# Altium PCB Control Board.PcbDoc
Units mm, origin at the board's own origin, x right, y up, seen from the top; angles counter-clockwise.
Board outline 60 x 50 mm, 2 copper layers (Top Layer, Bottom Layer); 9 components, 17 nets, 67 pads, 2 vias.
Unrouted connection lines stored in the file: 15.
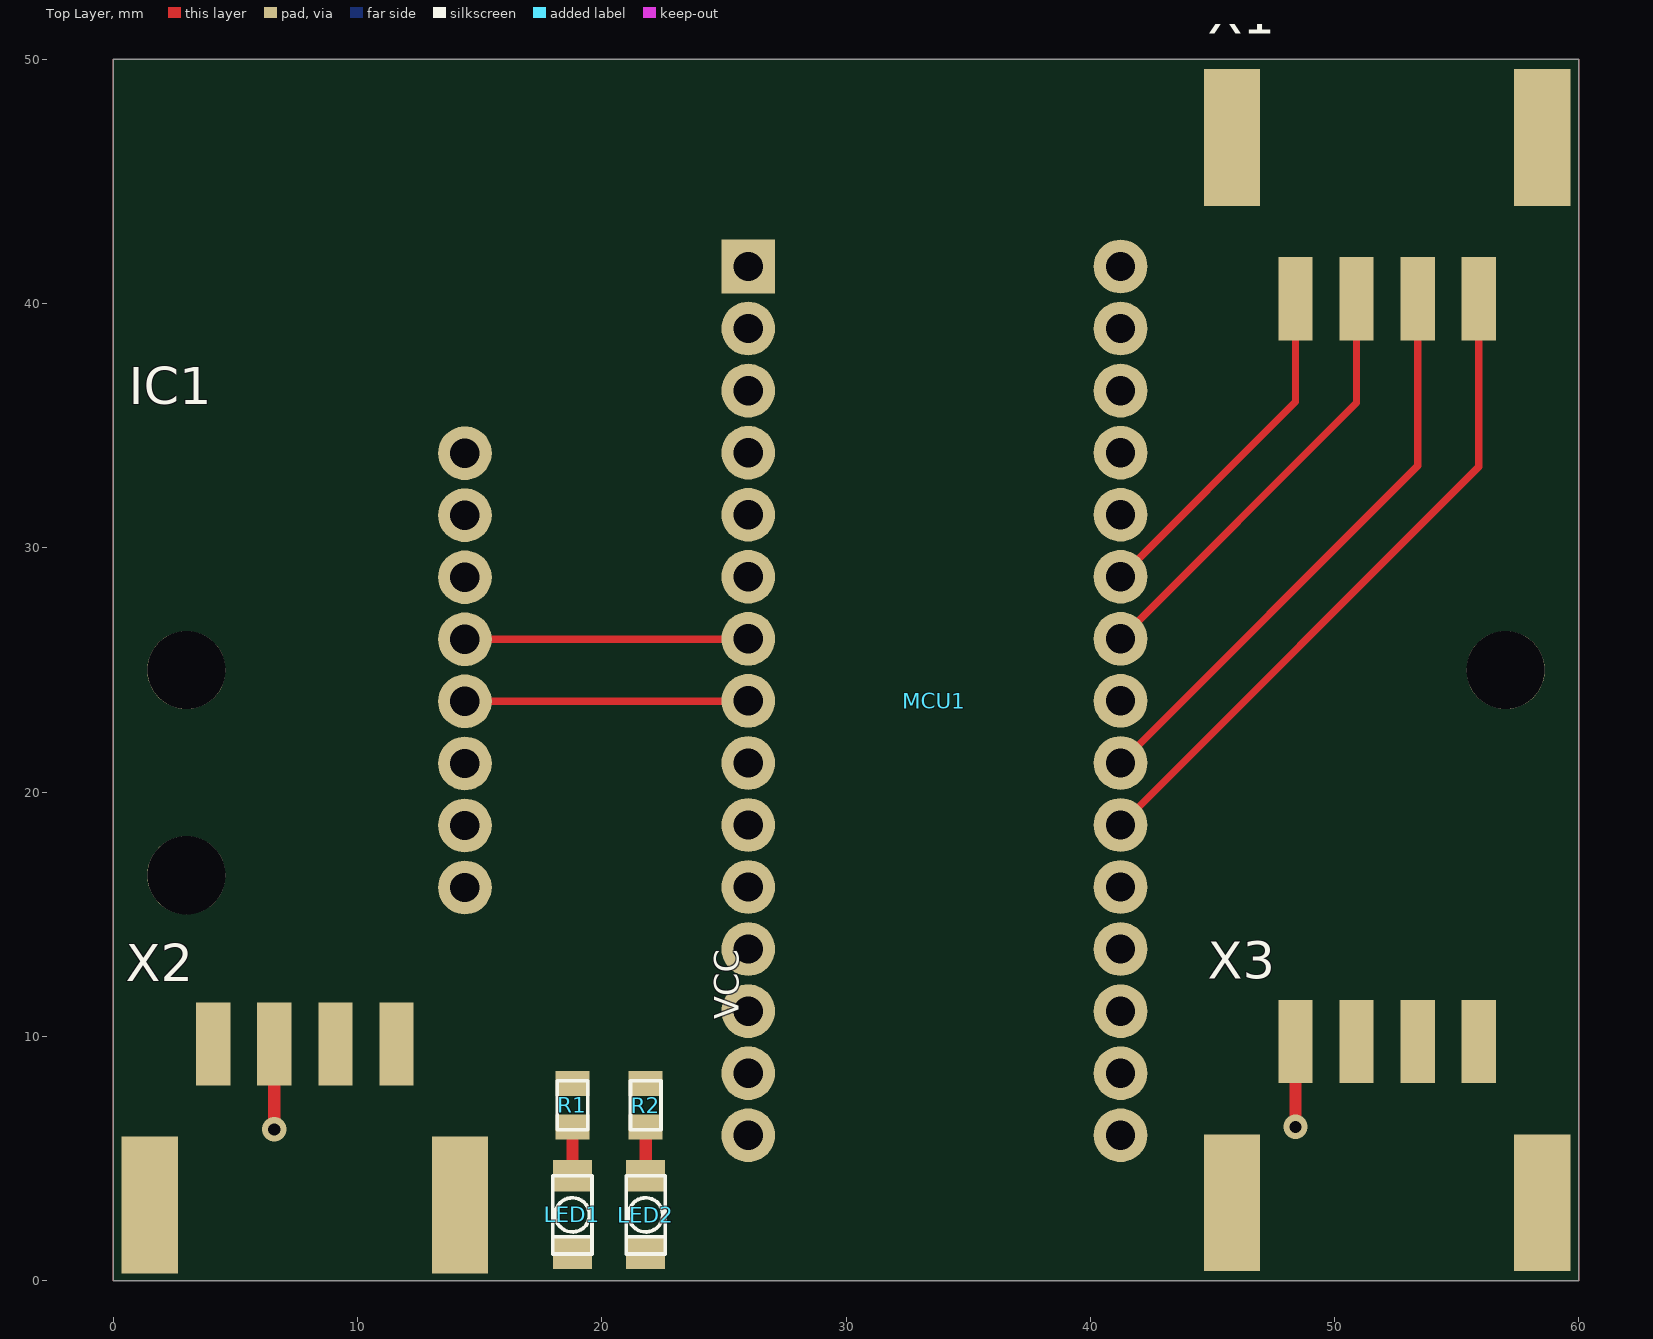
[diagram p0: Top Layer view]
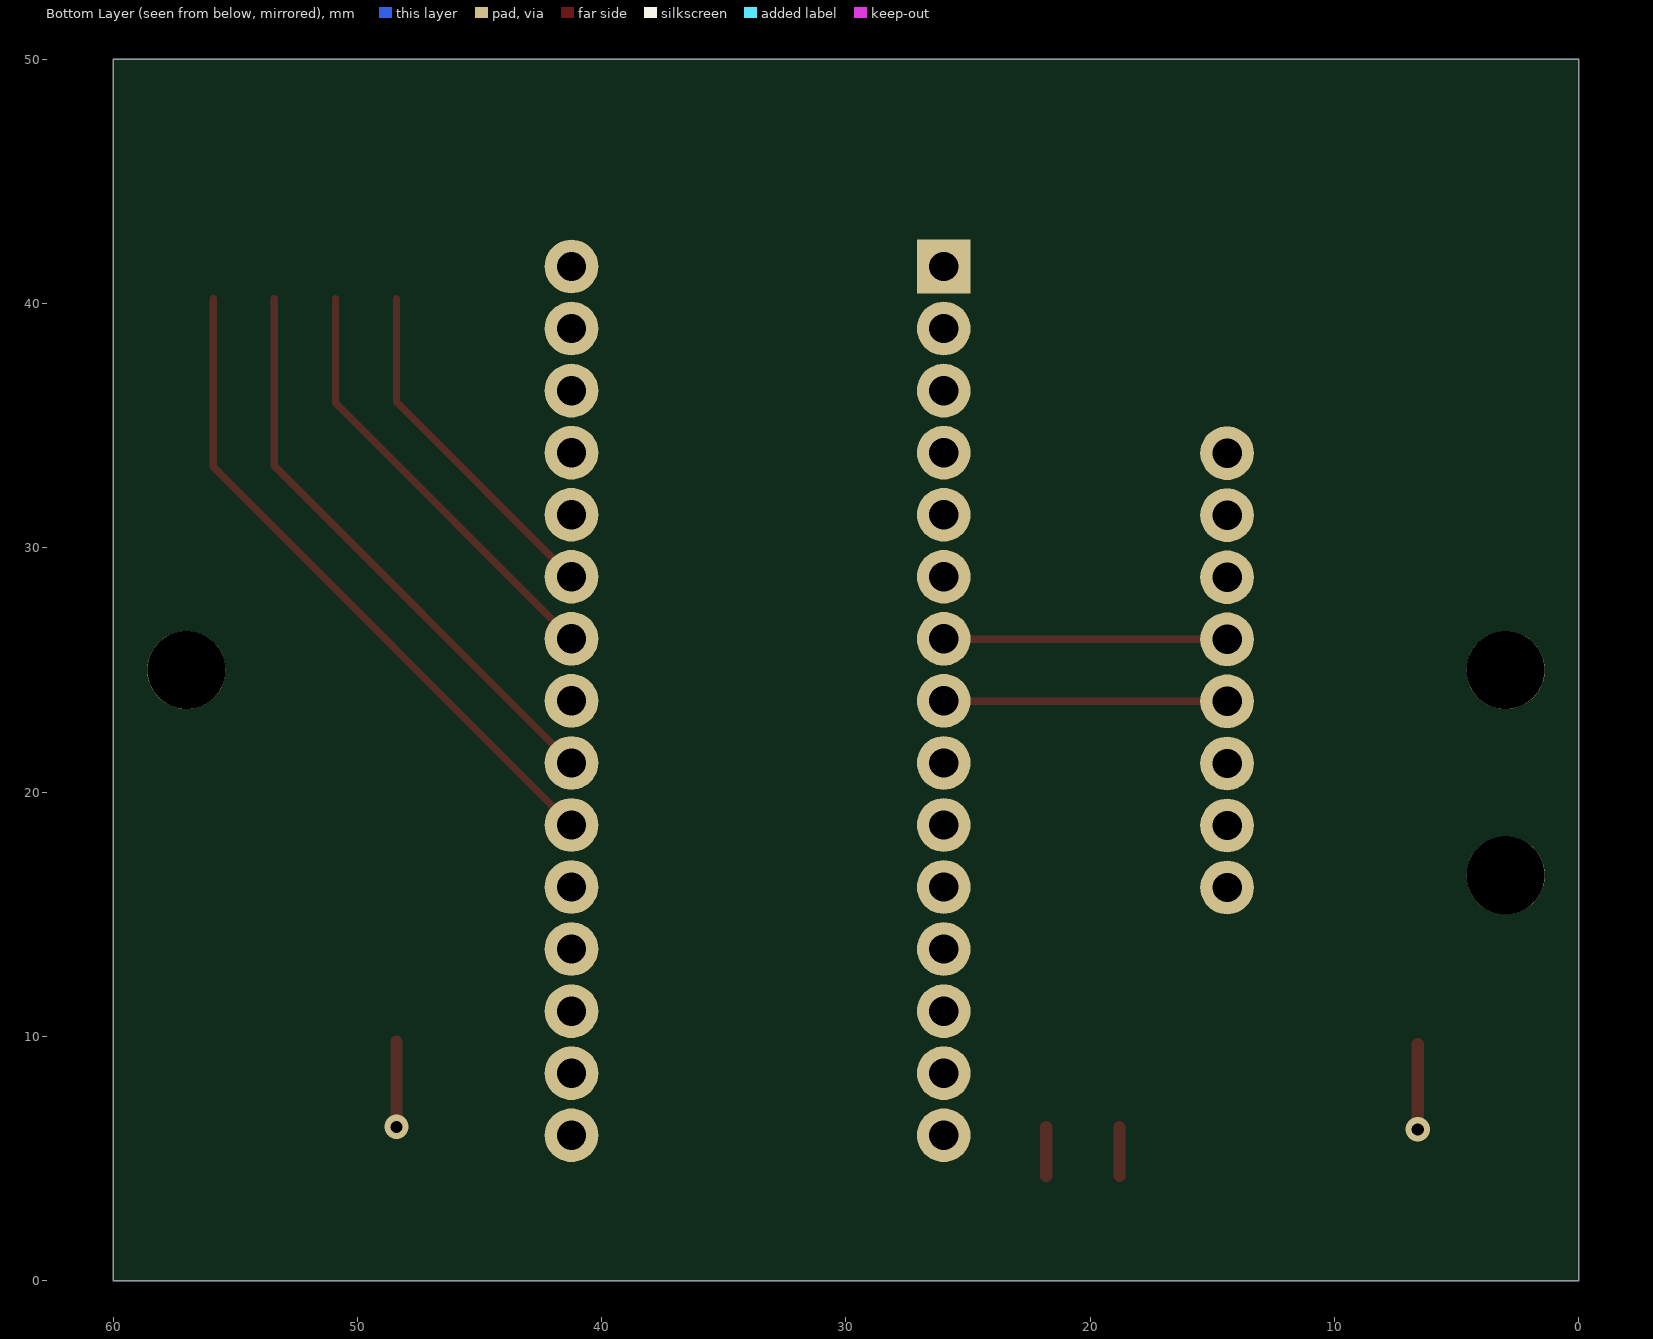
[diagram p1: Bottom Layer view, seen from below]

## Layer stack, top to bottom
Top Solder: solder mask 0.0102, Solder Resist, Dk 3.5
Top Layer: signal copper 0.0356
Dielectric 1: dielectric 0.32, FR-4, Dk 4.8
Bottom Layer: signal copper 0.0356
Bottom Solder: solder mask 0.0102, Solder Resist, Dk 3.5

## Board outline
0,0 60,0 60,50 0,50

## Design rules (kind name [scope] priority, off if disabled: settings)
Clearance [All] p1: gap=0.254 ignorepadtopadclearanceinfootprint=FALSE except(0: Arc-Hole Track-Hole SMDPad-Hole THPad-Hole Via-Hole Fill-Hole Poly-Hole Region-Hole Text-Hole)
PolygonConnect [All] p1: connectstyle=Relief reliefconductorwidth=0.254 reliefentries=4 polygonreliefangle="90 Angle" airgapwidth=0.254
RoutingVias [All] p1: holewidth=0.5 width=1 viastyle="Through Hole" minholewidth=0.3 minwidth=0.6 maxholewidth=1 maxwidth=2
SolderMaskExpansion [All] p1: expansion=0.102
Width [All] p1: maxlimit=2 minlimit=0.2 preferedwidth=0.5 minimp=50.000000 maximp=50.000000 favimp=50.000000
30 further rules are at their usual default settings.

## Components (designator, comment, footprint, x,y, rotation, side; value= is the part's Value field where it differs from the comment)
IC1 "MPU6050" MPU6050-BOARD 14.4,16.1 r90 top locked
LED1 "APT3216CGCK" LED_3216_GREEN 18.8,4.3 r270 top
LED2 "APT3216CGCK" LED_3216_GREEN 21.8,4.3 r270 top
MCU1 "STM32F303K8" "Nucleo STM32F303K8" 26,41.52 r270 top locked
R1 "Chip Resistor 10k, 0805, 1%" 0805_R 18.8,6.3 r90 top
R2 "Chip Resistor 10k, 0805, 1%" 0805_R 21.8,6.3 r90 top
X1 "Pin Header 4x1 2.54mm" "PTSM 0,5 4-2,5-H SMD" 55.9,40.2 r180 top locked
X2 "Pin Header 4x1 2.54mm" "PTSM 0,5 4-2,5-H SMD" 4.1,9.7 r0 top locked
X3 "Pin Header 4x1 2.54mm" "PTSM 0,5 4-2,5-H SMD" 48.4,9.8 r0 top locked

## Footprints (in the part's own frame and the unit in brackets; to place one, negate y for a bottom-side part, rotate by r counter-clockwise, add the part's x,y. Pads: shape width x height; smd on the part's side, far side on the other; paste and mask are expansions set on the pad)
0805_R [mil]
  rect 40x55 smd: 1(0,0) 2(70,0)
  silkscreen extent -4,-25 74,25, body extent -4,-25 74,25, height 31
LED_3216_GREEN [mm]
  rect 1.3x1.6 smd: A(0,0) K(3.175,0)
  silkscreen extent 0,-0.8 3.2,0.8, body extent 0,-0.8 3.2,0.8, height 1.11
MPU6050-BOARD [mm]
  round 2.2 hole 1.2: 1(0,0) 2(2.54,0) 3(5.08,0) 4(7.62,0) 5(10.16,0) 6(12.7,0) 7(15.24,0) 8(17.78,0)
  body extent -1.29,-1.23 19.03,14.02, height 7.77
"Nucleo STM32F303K8" [mm]
  rect 2.2x2.2 hole 1.2: 1(0,0)
  round 2.2 hole 1.2: 2(2.54,0) 3(5.08,0) 4(7.62,0) 5(10.16,0) 6(12.7,0) 7(15.24,0) 8(17.78,0) 9(20.32,0) 10(22.86,0) 11(25.4,0) 12(27.94,0) 13(30.48,0) 14(33.02,0) 15(35.56,0) 16(0,15.24) 17(2.54,15.24) 18(5.08,15.24) 19(7.62,15.24) 20(10.16,15.24) 21(12.7,15.24) 22(15.24,15.24) 23(17.78,15.24) 24(20.32,15.24) 25(22.86,15.24) 26(25.4,15.24) 27(27.94,15.24) 28(30.48,15.24) 29(33.02,15.24) 30(35.56,15.24)
  body extent -9.92,-1.6 42.08,16.95, height 12.57
"PTSM 0,5 4-2,5-H SMD" [mm] "4 Pol SMD"
  rect 2.3x5.6 smd: 0(-2.6,-6.6) 0(10.1,-6.6)
  rect 1.4x3.4 smd: 1(0,0) 2(2.5,0) 3(5,0) 4(7.5,0)
  body extent -3.37,-10.1 11.02,0.9, height 5

## Part data
IC1: library part "MPU6050 Board", "MPU6050 Sensor Board"
LED1 LED2: library part LED, "LED SMD green APT3216CGCK", Manufacturer=Kingbright, Part Number=604-APT3216CGCK, Comment_1=APT-3216CGCK, Notes=-, Price=0.4, Supplier 1=Mouser, Supplier Part Number 1=APT3216CGCK
MCU1: library part "Nucleo STM32F303K8"
R1 R2: library part RESISTOR, "Resistor 10k 0.125W 0805", Manufacturer=Vishay, Part Number=CRCW080510K0FKEAC, Supplier Part Number 1=71-CRCW080510K0FKEAC, Price=0.19, Supplier 1=Mouser
  R1: Comment_1=1.5k
  R2: Comment_1=560
X1 X2 X3: library part "PTSM 0,5/ 4-2,5-H SMD", "PTSM 4 Pol", Manufacturer="Phoenix Contacdt", Part Number=1814650, Supplier Part Number 1=651-1814650, Price=1.31, Supplier 1=Mouser

## Free pads (board coordinates)
  round 3.2 hole 3.2: 0(3,16.6) 0(3,25) 0(57,25)

## Via types
v1: diameter 1, hole 0.5, Top Layer to Bottom Layer, 2 vias

## Nets (pads, with @x,y where several pads share a name; then routed paths per layer and width w, separated by ;. In a path a pad name is that pad's centre, name@x,y a point inside that pad or via, vN(x,y) a via of type N, cw(c..) or ccw(c..) an arc to the next point about the centre after c; other vN are vias at no path point)
EN1,2: X3.2
GND: IC1.3 LED1.K LED2.K MCU1.4 MCU1.17 X2.4 X3.4
LEDMotorDriver: X3.3
NetIC1_6: IC1.6 MCU1.13
NetIC1_7: IC1.7 MCU1.15
NetIC1_8: IC1.8 MCU1.14
NetLED1_A: LED1.A R1.1 | length 2
  Top Layer w0.5: LED1.A R1.1
NetLED2_A: LED2.A R2.1 | length 2
  Top Layer w0.5: LED2.A R2.1
PWM1: MCU1.25 X1.1 | length 27.6
  Top Layer w0.3: MCU1.25 55.9,33.32 X1.1
PWM2: MCU1.24 X1.2 | length 24
  Top Layer w0.3: MCU1.24 53.4,33.36 X1.2
PWM3: MCU1.22 X1.3 | length 17.9
  Top Layer w0.3: MCU1.22 50.9,35.94 X1.3
PWM4: MCU1.21 X1.4 | length 14.3
  Top Layer w0.3: MCU1.21 48.4,35.98 X1.4
SCL: IC1.4 MCU1.8 | length 11.6
  Top Layer w0.3: IC1.4 25.98,23.72 MCU1.8
SDA: IC1.5 MCU1.7 | length 11.6
  Top Layer w0.3: IC1.5 25.98,26.26 MCU1.7
UBat: X2.3
Vbat: MCU1.16 R1.2 X2.1 X3.1 | length 3.5
  Top Layer w0.5: v1(48.4,6.3) X3.1
VCC: IC1.1 MCU1.29 R2.2 X2.2 | length 3.5
  Top Layer w0.5: v1(6.6,6.2) X2.2
pads on no net: IC1.2 MCU1.1 MCU1.2 MCU1.3 MCU1.5 MCU1.6 MCU1.9 MCU1.10 MCU1.11 MCU1.12 MCU1.18 MCU1.19 MCU1.20 MCU1.23 MCU1.26 MCU1.27 MCU1.28 MCU1.30 X1.0 X2.0 X3.0

## Polygon pours and split planes (outlines as drawn)
GND on Top Layer "GND" (solid, shelved, pour order 0): 0,0 0,50 60,50 60,0
VCC on Bottom Layer "VCC" (solid, shelved, pour order 2): 0,0 0,50 60,50 60,0

## Silkscreen, mask and mechanical layers (free items; w line width, h text height)
Top Overlay:
  text "VCC" at 25.6,10.7 h1 r90
Top Solder:
  text "Balancer Robot / Controler Board V1.00 / M.Lacher" at 0.9,44.6 h1
Mechanical 1:
  the board outline again, w0.254